# EAGLE board SX1509-Breakout_Panel_v20 (EAGLE 7.4.0), part 1 of 6
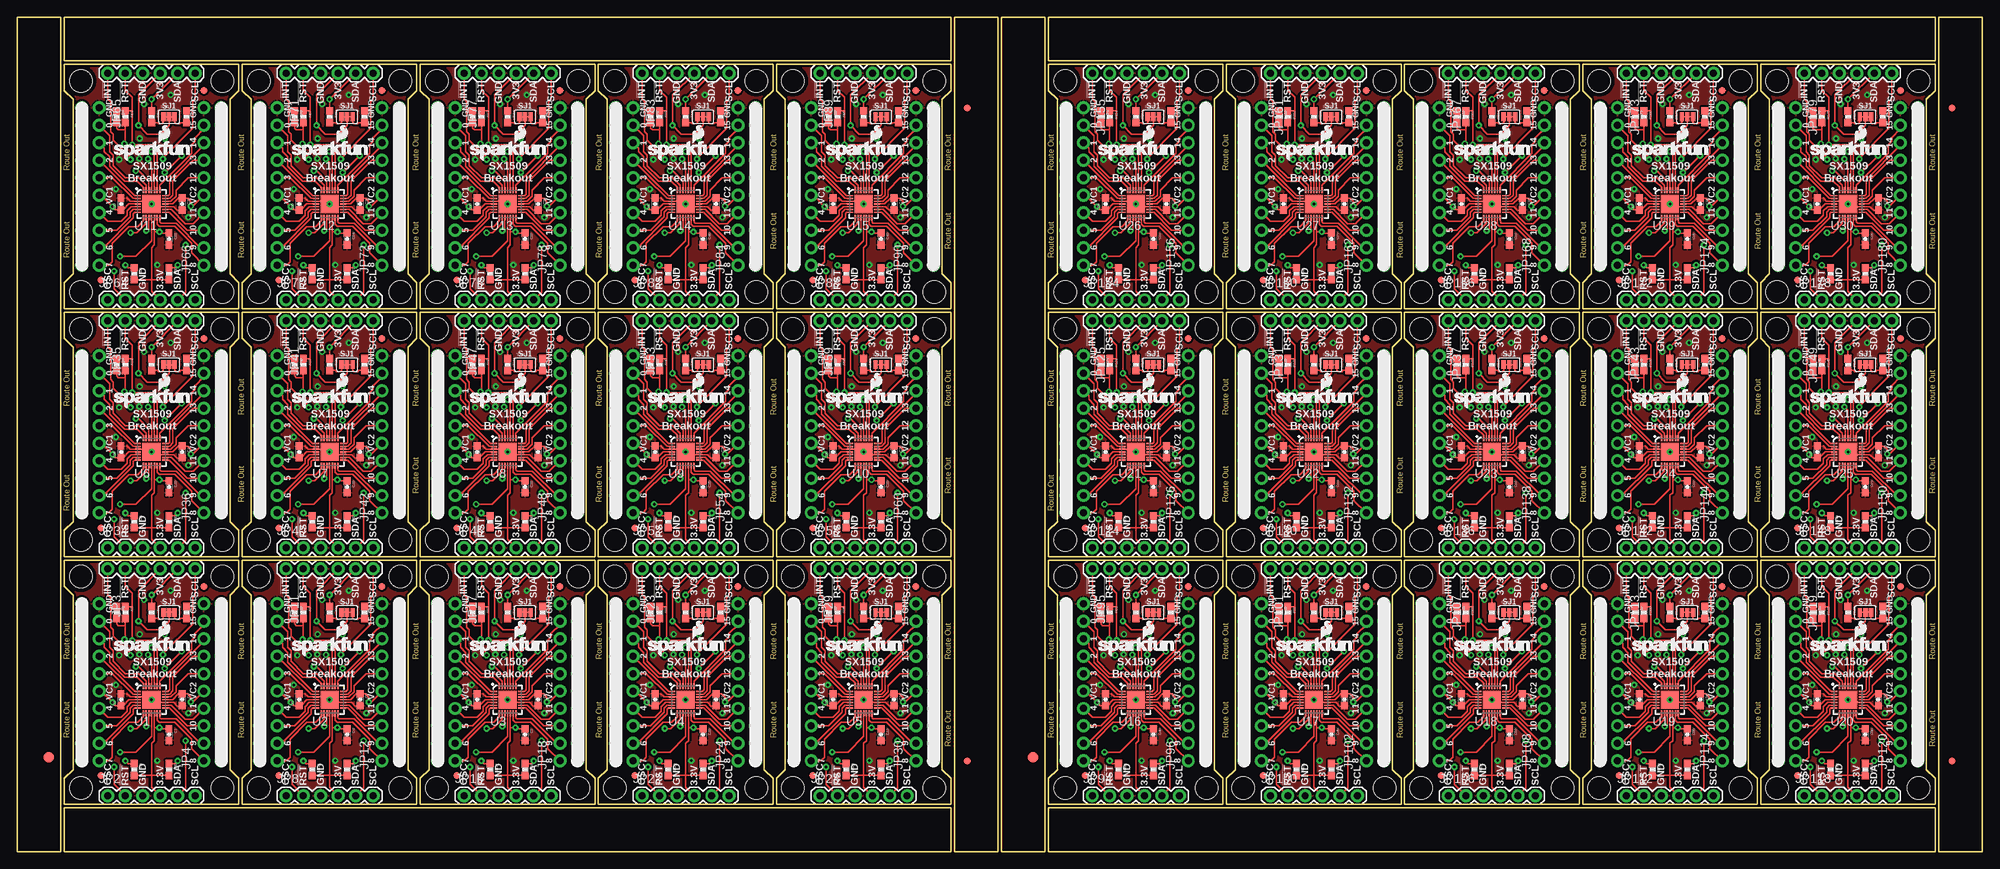
[diagram p0: board, top side]
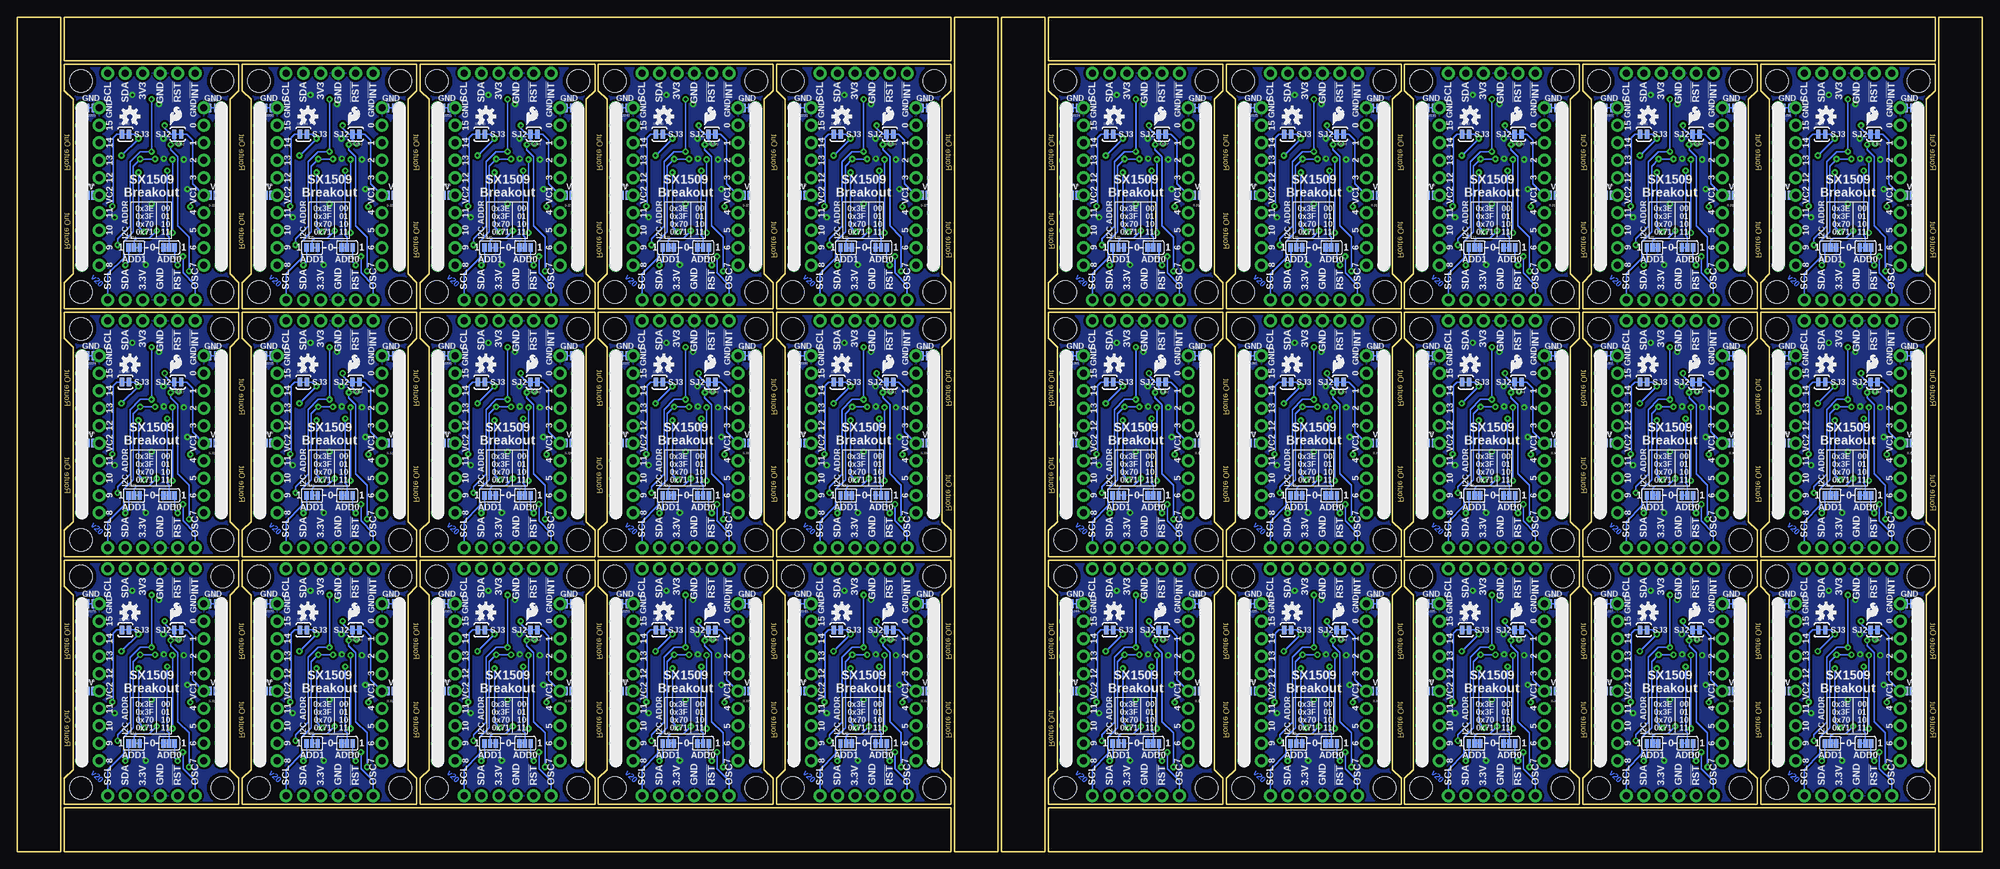
[diagram p1: board, bottom side, seen from below]

Size 286 x 121.41 mm. Coordinates in mm from the lower left corner, seen from the top.
Outline: 392 segments
Copper layers (1*16): Top 0.035mm / dielectric 1.5mm / Bottom 0.035mm
Design rules "SparkFun-2-layer *": minimum track width 7mil, minimum drill 15mil, track to track 6mil, track to pad 6mil, pad to pad 6mil, via to via 6mil, smd to smd 6mil, copper to edge 8mil, drill to drill 8mil, minimum pad ring 12mil, minimum via ring 10mil, stop-mask expansion 4mil, vias tented up to drill 20mil, thermal gap 10mil

## Footprints (pad centres in the part's own frame; a part is rotated, then mirrored left to right if it is on the bottom)
0603-CAP = smd 1.1 x 1: 1 -0.85,0; 2 0.85,0
FIDUCIAL-1.5X3 = smd 1.5 x 1.5: 1 0,0
FIDUCIAL-1X2 = smd 1 x 1: 1 0,0
1X06 = drill 1.016 pad 1.88: 1 0,0; 2 2.54,0; 3 5.08,0; 4 7.62,0; 5 10.16,0; 6 12.7,0
2X10_ROUND_NOSILK = drill 1.016 pad 1.88: 1 -11.43,-1.27; 2 -11.43,1.27; 3 -8.89,-1.27; 4 -8.89,1.27; 5 -6.35,-1.27; 6 -6.35,1.27; 7 -3.81,-1.27; 8 -3.81,1.27; 9 -1.27,-1.27; 10 -1.27,1.27; 11 1.27,-1.27; 12 1.27,1.27; 13 3.81,-1.27; 14 3.81,1.27; 15 6.35,-1.27; 16 6.35,1.27; 17 8.89,-1.27; 18 8.89,1.27; 19 11.43,-1.27; 20 11.43,1.27
0603-RES = smd 1.1 x 1: 1 -0.85,0; 2 0.85,0
PAD-JUMPER-3-3OF3_NC_BY_TRACE_YES_SILK_FULL_BOX = smd 0.635 x 1.27: 1 -0.813,0; 2 0,0; 3 0.813,0
PAD-JUMPER-2-NC_BY_TRACE_YES_SILK = smd 0.635 x 1.27: 1 -0.508,0; 2 0.508,0
PAD-JUMPER-3-2OF3_NC_BY_TRACE_YES_SILK_FULL_BOX = smd 0.635 x 1.27: 1 -0.813,0; 2 0,0; 3 0.813,0
PAD-JUMPER-2-NO_NO_SILK = smd 0.635 x 1.27: 1 -0.45,0; 2 0.45,0
PAD-JUMPER-2-NC_BY_TRACE_NO_SILK = smd 0.635 x 1.27: 1 -0.508,0; 2 0.508,0
STAND-OFF = hole 3.302: 0,0
QFN-28 = smd 0.85 x 0.2: 1 -1.975,1.2; 2 -1.975,0.8; 3 -1.975,0.4; 4 -1.975,0; 5 -1.975,-0.4; 6 -1.975,-0.8; 7 -1.975,-1.2; 15 1.975,-1.2; 16 1.975,-0.8; 17 1.975,-0.4; 18 1.975,0; 19 1.975,0.4; 20 1.975,0.8; 21 1.975,1.2 | smd 0.2 x 0.85: 8 -1.2,-1.975; 9 -0.8,-1.975; 10 -0.4,-1.975; 11 0,-1.975; 12 0.4,-1.975; 13 0.8,-1.975; 14 1.2,-1.975; 22 1.2,1.975; 23 0.8,1.975; 24 0.4,1.975; 25 0,1.975; 26 -0.4,1.975; 27 -0.8,1.975; 28 -1.2,1.975 | smd 2.65 x 2.65: 29 0,0

## Placement (x,y rotation side)
C1  0.1uF  [0603-CAP]  22.1,17.02 270 top
C2  0.1uF  [0603-CAP]  15.11,22.1 90 top
C3  0.1uF  [0603-CAP]  24,22.1 270 top
C4  0.1uF  [0603-CAP]  48.01,17.02 270 top
C5  0.1uF  [0603-CAP]  49.91,22.1 270 top
C6  0.1uF  [0603-CAP]  41.02,22.1 90 top
C7  0.1uF  [0603-CAP]  73.91,17.02 270 top
C8  0.1uF  [0603-CAP]  75.82,22.1 270 top
C9  0.1uF  [0603-CAP]  66.93,22.1 90 top
C10  0.1uF  [0603-CAP]  99.82,17.02 270 top
C11  0.1uF  [0603-CAP]  101.73,22.1 270 top
C12  0.1uF  [0603-CAP]  92.84,22.1 90 top
C13  0.1uF  [0603-CAP]  125.73,17.02 270 top
C14  0.1uF  [0603-CAP]  127.64,22.1 270 top
C15  0.1uF  [0603-CAP]  118.75,22.1 90 top
C16  0.1uF  [0603-CAP]  22.1,53.09 270 top
C17  0.1uF  [0603-CAP]  24,58.17 270 top
C18  0.1uF  [0603-CAP]  15.11,58.17 90 top
C19  0.1uF  [0603-CAP]  48.01,53.09 270 top
C20  0.1uF  [0603-CAP]  49.91,58.17 270 top
C21  0.1uF  [0603-CAP]  41.02,58.17 90 top
C22  0.1uF  [0603-CAP]  73.91,53.09 270 top
C23  0.1uF  [0603-CAP]  75.82,58.17 270 top
C24  0.1uF  [0603-CAP]  66.93,58.17 90 top
C25  0.1uF  [0603-CAP]  99.82,53.09 270 top
C26  0.1uF  [0603-CAP]  101.73,58.17 270 top
C27  0.1uF  [0603-CAP]  92.84,58.17 90 top
C28  0.1uF  [0603-CAP]  125.73,53.09 270 top
C29  0.1uF  [0603-CAP]  127.64,58.17 270 top
C30  0.1uF  [0603-CAP]  118.75,58.17 90 top
C31  0.1uF  [0603-CAP]  22.1,89.15 270 top
C32  0.1uF  [0603-CAP]  24,94.23 270 top
C33  0.1uF  [0603-CAP]  15.11,94.23 90 top
C34  0.1uF  [0603-CAP]  48.01,89.15 270 top
C35  0.1uF  [0603-CAP]  49.91,94.23 270 top
C36  0.1uF  [0603-CAP]  41.02,94.23 90 top
C37  0.1uF  [0603-CAP]  73.91,89.15 270 top
C38  0.1uF  [0603-CAP]  75.82,94.23 270 top
C39  0.1uF  [0603-CAP]  66.93,94.23 90 top
C40  0.1uF  [0603-CAP]  99.82,89.15 270 top
C41  0.1uF  [0603-CAP]  101.73,94.23 270 top
C42  0.1uF  [0603-CAP]  92.84,94.23 90 top
C43  0.1uF  [0603-CAP]  125.73,89.15 270 top
C44  0.1uF  [0603-CAP]  127.64,94.23 270 top
C45  0.1uF  [0603-CAP]  118.75,94.23 90 top
C46  0.1uF  [0603-CAP]  165.35,17.02 270 top
C47  0.1uF  [0603-CAP]  167.26,22.1 270 top
C48  0.1uF  [0603-CAP]  158.37,22.1 90 top
C49  0.1uF  [0603-CAP]  191.26,17.02 270 top
C50  0.1uF  [0603-CAP]  193.17,22.1 270 top
C51  0.1uF  [0603-CAP]  184.28,22.1 90 top
C52  0.1uF  [0603-CAP]  217.17,17.02 270 top
C53  0.1uF  [0603-CAP]  219.07,22.1 270 top
C54  0.1uF  [0603-CAP]  210.19,22.1 90 top
C55  0.1uF  [0603-CAP]  243.08,17.02 270 top
C56  0.1uF  [0603-CAP]  244.98,22.1 270 top
C57  0.1uF  [0603-CAP]  236.09,22.1 90 top
C58  0.1uF  [0603-CAP]  268.99,17.02 270 top
C59  0.1uF  [0603-CAP]  270.89,22.1 270 top
C60  0.1uF  [0603-CAP]  262,22.1 90 top
C61  0.1uF  [0603-CAP]  165.35,53.09 270 top
C62  0.1uF  [0603-CAP]  167.26,58.17 270 top
C63  0.1uF  [0603-CAP]  158.37,58.17 90 top
C64  0.1uF  [0603-CAP]  191.26,53.09 270 top
C65  0.1uF  [0603-CAP]  193.17,58.17 270 top
C66  0.1uF  [0603-CAP]  184.28,58.17 90 top
C67  0.1uF  [0603-CAP]  217.17,53.09 270 top
C68  0.1uF  [0603-CAP]  219.07,58.17 270 top
C69  0.1uF  [0603-CAP]  210.19,58.17 90 top
C70  0.1uF  [0603-CAP]  243.08,53.09 270 top
C71  0.1uF  [0603-CAP]  244.98,58.17 270 top
C72  0.1uF  [0603-CAP]  236.09,58.17 90 top
C73  0.1uF  [0603-CAP]  268.99,53.09 270 top
C74  0.1uF  [0603-CAP]  270.89,58.17 270 top
C75  0.1uF  [0603-CAP]  262,58.17 90 top
C76  0.1uF  [0603-CAP]  165.35,89.15 270 top
C77  0.1uF  [0603-CAP]  167.26,94.23 270 top
C78  0.1uF  [0603-CAP]  158.37,94.23 90 top
C79  0.1uF  [0603-CAP]  191.26,89.15 270 top
C80  0.1uF  [0603-CAP]  193.17,94.23 270 top
C81  0.1uF  [0603-CAP]  184.28,94.23 90 top
C82  0.1uF  [0603-CAP]  217.17,89.15 270 top
C83  0.1uF  [0603-CAP]  219.07,94.23 270 top
C84  0.1uF  [0603-CAP]  210.19,94.23 90 top
C85  0.1uF  [0603-CAP]  243.08,89.15 270 top
C86  0.1uF  [0603-CAP]  244.98,94.23 270 top
C87  0.1uF  [0603-CAP]  236.09,94.23 90 top
C88  0.1uF  [0603-CAP]  268.99,89.15 270 top
C89  0.1uF  [0603-CAP]  270.89,94.23 270 top
C90  0.1uF  [0603-CAP]  262,94.23 90 top
E$1  [FIDUCIAL-1.5X3]  4.57,13.72 0 top
E$2  [FIDUCIAL-1X2]  281.56,13.21 0 top
E$3  [FIDUCIAL-1X2]  281.56,108.2 180 top
E$4  [FIDUCIAL-1X2]  138.3,13.21 0 top
E$5  [FIDUCIAL-1X2]  138.3,108.2 180 top
E$6  [FIDUCIAL-1.5X3]  147.83,13.72 0 top
JP1  [1X06]  13.21,41.15 0 top
JP2  [1X06]  13.21,8.13 0 top
JP3  [2X10_ROUND_NOSILK]  10.67,24.64 270 top
JP4  [2X10_ROUND_NOSILK]  28.45,24.64 90 top
JP5  FIDUCIAL1X2  [FIDUCIAL-1X2]  53.09,38.61 0 top
JP6  FIDUCIAL1X2  [FIDUCIAL-1X2]  38.1,11.05 0 top
JP7  [1X06]  39.12,41.15 0 top
JP8  [1X06]  39.12,8.13 0 top
JP9  FIDUCIAL1X2  [FIDUCIAL-1X2]  27.18,38.61 0 top
JP10  FIDUCIAL1X2  [FIDUCIAL-1X2]  12.19,11.05 0 top
JP11  [2X10_ROUND_NOSILK]  36.58,24.64 270 top
JP12  [2X10_ROUND_NOSILK]  54.36,24.64 90 top
JP13  FIDUCIAL1X2  [FIDUCIAL-1X2]  78.99,38.61 0 top
JP14  FIDUCIAL1X2  [FIDUCIAL-1X2]  64.01,11.05 0 top
JP15  [1X06]  65.02,41.15 0 top
JP16  [1X06]  65.02,8.13 0 top
JP17  [2X10_ROUND_NOSILK]  62.48,24.64 270 top
JP18  [2X10_ROUND_NOSILK]  80.26,24.64 90 top
JP19  FIDUCIAL1X2  [FIDUCIAL-1X2]  104.9,38.61 0 top
JP20  FIDUCIAL1X2  [FIDUCIAL-1X2]  89.92,11.05 0 top
JP21  [1X06]  90.93,41.15 0 top
JP22  [1X06]  90.93,8.13 0 top
JP23  [2X10_ROUND_NOSILK]  88.39,24.64 270 top
JP24  [2X10_ROUND_NOSILK]  106.17,24.64 90 top
JP25  FIDUCIAL1X2  [FIDUCIAL-1X2]  130.81,38.61 0 top
JP26  FIDUCIAL1X2  [FIDUCIAL-1X2]  115.82,11.05 0 top
JP27  [1X06]  116.84,41.15 0 top
JP28  [1X06]  116.84,8.13 0 top
JP29  [2X10_ROUND_NOSILK]  114.3,24.64 270 top
JP30  [2X10_ROUND_NOSILK]  132.08,24.64 90 top
JP31  FIDUCIAL1X2  [FIDUCIAL-1X2]  27.18,74.68 0 top
JP32  FIDUCIAL1X2  [FIDUCIAL-1X2]  12.19,47.12 0 top
JP33  [1X06]  13.21,77.22 0 top
JP34  [1X06]  13.21,44.2 0 top
JP35  [2X10_ROUND_NOSILK]  10.67,60.71 270 top
JP36  [2X10_ROUND_NOSILK]  28.45,60.71 90 top
JP37  FIDUCIAL1X2  [FIDUCIAL-1X2]  53.09,74.68 0 top
JP38  FIDUCIAL1X2  [FIDUCIAL-1X2]  38.1,47.12 0 top
JP39  [1X06]  39.12,77.22 0 top
JP40  [1X06]  39.12,44.2 0 top
JP41  [2X10_ROUND_NOSILK]  36.58,60.71 270 top
JP42  [2X10_ROUND_NOSILK]  54.36,60.71 90 top
JP43  FIDUCIAL1X2  [FIDUCIAL-1X2]  78.99,74.68 0 top
JP44  FIDUCIAL1X2  [FIDUCIAL-1X2]  64.01,47.12 0 top
JP45  [1X06]  65.02,77.22 0 top
JP46  [1X06]  65.02,44.2 0 top
JP47  [2X10_ROUND_NOSILK]  62.48,60.71 270 top
JP48  [2X10_ROUND_NOSILK]  80.26,60.71 90 top
JP49  FIDUCIAL1X2  [FIDUCIAL-1X2]  104.9,74.68 0 top
JP50  FIDUCIAL1X2  [FIDUCIAL-1X2]  89.92,47.12 0 top
JP51  [1X06]  90.93,77.22 0 top
JP52  [1X06]  90.93,44.2 0 top
JP53  [2X10_ROUND_NOSILK]  88.39,60.71 270 top
JP54  [2X10_ROUND_NOSILK]  106.17,60.71 90 top
JP55  FIDUCIAL1X2  [FIDUCIAL-1X2]  130.81,74.68 0 top
JP56  FIDUCIAL1X2  [FIDUCIAL-1X2]  115.82,47.12 0 top
JP57  [1X06]  116.84,77.22 0 top
JP58  [1X06]  116.84,44.2 0 top
JP59  [2X10_ROUND_NOSILK]  114.3,60.71 270 top
JP60  [2X10_ROUND_NOSILK]  132.08,60.71 90 top
JP61  FIDUCIAL1X2  [FIDUCIAL-1X2]  27.18,110.74 0 top
JP62  FIDUCIAL1X2  [FIDUCIAL-1X2]  12.19,83.19 0 top
JP63  [1X06]  13.21,113.28 0 top
JP64  [1X06]  13.21,80.26 0 top
JP65  [2X10_ROUND_NOSILK]  10.67,96.77 270 top
JP66  [2X10_ROUND_NOSILK]  28.45,96.77 90 top
JP67  FIDUCIAL1X2  [FIDUCIAL-1X2]  53.09,110.74 0 top
JP68  FIDUCIAL1X2  [FIDUCIAL-1X2]  38.1,83.19 0 top
JP69  [1X06]  39.12,113.28 0 top
JP70  [1X06]  39.12,80.26 0 top
JP71  [2X10_ROUND_NOSILK]  36.58,96.77 270 top
JP72  [2X10_ROUND_NOSILK]  54.36,96.77 90 top
JP73  FIDUCIAL1X2  [FIDUCIAL-1X2]  78.99,110.74 0 top
JP74  FIDUCIAL1X2  [FIDUCIAL-1X2]  64.01,83.19 0 top
JP75  [1X06]  65.02,113.28 0 top
JP76  [1X06]  65.02,80.26 0 top
JP77  [2X10_ROUND_NOSILK]  62.48,96.77 270 top
JP78  [2X10_ROUND_NOSILK]  80.26,96.77 90 top
JP79  FIDUCIAL1X2  [FIDUCIAL-1X2]  104.9,110.74 0 top
JP80  FIDUCIAL1X2  [FIDUCIAL-1X2]  89.92,83.19 0 top
JP81  [1X06]  90.93,113.28 0 top
JP82  [1X06]  90.93,80.26 0 top
JP83  [2X10_ROUND_NOSILK]  88.39,96.77 270 top
JP84  [2X10_ROUND_NOSILK]  106.17,96.77 90 top
JP85  FIDUCIAL1X2  [FIDUCIAL-1X2]  130.81,110.74 0 top
JP86  FIDUCIAL1X2  [FIDUCIAL-1X2]  115.82,83.19 0 top
JP87  [1X06]  116.84,113.28 0 top
JP88  [1X06]  116.84,80.26 0 top
JP89  [2X10_ROUND_NOSILK]  114.3,96.77 270 top
JP90  [2X10_ROUND_NOSILK]  132.08,96.77 90 top
JP91  FIDUCIAL1X2  [FIDUCIAL-1X2]  170.43,38.61 0 top
JP92  FIDUCIAL1X2  [FIDUCIAL-1X2]  155.45,11.05 0 top
JP93  [1X06]  156.46,41.15 0 top
JP94  [1X06]  156.46,8.13 0 top
JP95  [2X10_ROUND_NOSILK]  153.92,24.64 270 top
JP96  [2X10_ROUND_NOSILK]  171.7,24.64 90 top
JP97  FIDUCIAL1X2  [FIDUCIAL-1X2]  196.34,38.61 0 top
JP98  FIDUCIAL1X2  [FIDUCIAL-1X2]  181.36,11.05 0 top
JP99  [1X06]  182.37,41.15 0 top
JP100  [1X06]  182.37,8.13 0 top
JP101  [2X10_ROUND_NOSILK]  179.83,24.64 270 top
JP102  [2X10_ROUND_NOSILK]  197.61,24.64 90 top
JP103  FIDUCIAL1X2  [FIDUCIAL-1X2]  222.25,38.61 0 top
JP104  FIDUCIAL1X2  [FIDUCIAL-1X2]  207.26,11.05 0 top
JP105  [1X06]  208.28,41.15 0 top
JP106  [1X06]  208.28,8.13 0 top
JP107  [2X10_ROUND_NOSILK]  205.74,24.64 270 top
JP108  [2X10_ROUND_NOSILK]  223.52,24.64 90 top
JP109  FIDUCIAL1X2  [FIDUCIAL-1X2]  248.16,38.61 0 top
JP110  FIDUCIAL1X2  [FIDUCIAL-1X2]  233.17,11.05 0 top
JP111  [1X06]  234.19,41.15 0 top
JP112  [1X06]  234.19,8.13 0 top
JP113  [2X10_ROUND_NOSILK]  231.65,24.64 270 top
JP114  [2X10_ROUND_NOSILK]  249.43,24.64 90 top
JP115  FIDUCIAL1X2  [FIDUCIAL-1X2]  274.07,38.61 0 top
JP116  FIDUCIAL1X2  [FIDUCIAL-1X2]  259.08,11.05 0 top
JP117  [1X06]  260.1,41.15 0 top
JP118  [1X06]  260.1,8.13 0 top
JP119  [2X10_ROUND_NOSILK]  257.56,24.64 270 top
JP120  [2X10_ROUND_NOSILK]  275.34,24.64 90 top
JP121  FIDUCIAL1X2  [FIDUCIAL-1X2]  170.43,74.68 0 top
JP122  FIDUCIAL1X2  [FIDUCIAL-1X2]  155.45,47.12 0 top
JP123  [1X06]  156.46,77.22 0 top
JP124  [1X06]  156.46,44.2 0 top
JP125  [2X10_ROUND_NOSILK]  153.92,60.71 270 top
JP126  [2X10_ROUND_NOSILK]  171.7,60.71 90 top
JP127  FIDUCIAL1X2  [FIDUCIAL-1X2]  196.34,74.68 0 top
JP128  FIDUCIAL1X2  [FIDUCIAL-1X2]  181.36,47.12 0 top
JP129  [1X06]  182.37,77.22 0 top
JP130  [1X06]  182.37,44.2 0 top
JP131  [2X10_ROUND_NOSILK]  179.83,60.71 270 top
JP132  [2X10_ROUND_NOSILK]  197.61,60.71 90 top
JP133  FIDUCIAL1X2  [FIDUCIAL-1X2]  222.25,74.68 0 top
JP134  FIDUCIAL1X2  [FIDUCIAL-1X2]  207.26,47.12 0 top
JP135  [1X06]  208.28,77.22 0 top
JP136  [1X06]  208.28,44.2 0 top
JP137  [2X10_ROUND_NOSILK]  205.74,60.71 270 top
JP138  [2X10_ROUND_NOSILK]  223.52,60.71 90 top
JP139  FIDUCIAL1X2  [FIDUCIAL-1X2]  248.16,74.68 0 top
JP140  FIDUCIAL1X2  [FIDUCIAL-1X2]  233.17,47.12 0 top
JP141  [1X06]  234.19,77.22 0 top
JP142  [1X06]  234.19,44.2 0 top
JP143  [2X10_ROUND_NOSILK]  231.65,60.71 270 top
JP144  [2X10_ROUND_NOSILK]  249.43,60.71 90 top
JP145  FIDUCIAL1X2  [FIDUCIAL-1X2]  274.07,74.68 0 top
JP146  FIDUCIAL1X2  [FIDUCIAL-1X2]  259.08,47.12 0 top
JP147  [1X06]  260.1,77.22 0 top
JP148  [1X06]  260.1,44.2 0 top
JP149  [2X10_ROUND_NOSILK]  257.56,60.71 270 top
JP150  [2X10_ROUND_NOSILK]  275.34,60.71 90 top
JP151  FIDUCIAL1X2  [FIDUCIAL-1X2]  170.43,110.74 0 top
JP152  FIDUCIAL1X2  [FIDUCIAL-1X2]  155.45,83.19 0 top
JP153  [1X06]  156.46,113.28 0 top
JP154  [1X06]  156.46,80.26 0 top
JP155  [2X10_ROUND_NOSILK]  153.92,96.77 270 top
JP156  [2X10_ROUND_NOSILK]  171.7,96.77 90 top
JP157  FIDUCIAL1X2  [FIDUCIAL-1X2]  196.34,110.74 0 top
JP158  FIDUCIAL1X2  [FIDUCIAL-1X2]  181.36,83.19 0 top
JP159  [1X06]  182.37,113.28 0 top
JP160  [1X06]  182.37,80.26 0 top
JP161  [2X10_ROUND_NOSILK]  179.83,96.77 270 top
JP162  [2X10_ROUND_NOSILK]  197.61,96.77 90 top
JP163  FIDUCIAL1X2  [FIDUCIAL-1X2]  222.25,110.74 0 top
JP164  FIDUCIAL1X2  [FIDUCIAL-1X2]  207.26,83.19 0 top
JP165  [1X06]  208.28,113.28 0 top
JP166  [1X06]  208.28,80.26 0 top
JP167  [2X10_ROUND_NOSILK]  205.74,96.77 270 top
JP168  [2X10_ROUND_NOSILK]  223.52,96.77 90 top
JP169  FIDUCIAL1X2  [FIDUCIAL-1X2]  248.16,110.74 0 top
JP170  FIDUCIAL1X2  [FIDUCIAL-1X2]  233.17,83.19 0 top
JP171  [1X06]  234.19,113.28 0 top
JP172  [1X06]  234.19,80.26 0 top
JP173  [2X10_ROUND_NOSILK]  231.65,96.77 270 top
JP174  [2X10_ROUND_NOSILK]  249.43,96.77 90 top
JP175  FIDUCIAL1X2  [FIDUCIAL-1X2]  274.07,110.74 0 top
JP176  FIDUCIAL1X2  [FIDUCIAL-1X2]  259.08,83.19 0 top
JP177  [1X06]  260.1,113.28 0 top
JP178  [1X06]  260.1,80.26 0 top
JP179  [2X10_ROUND_NOSILK]  257.56,96.77 270 top
JP180  [2X10_ROUND_NOSILK]  275.34,96.77 90 top
LOGO1  SFE_LOGO_NAME_FLAME.1_INCH  [SFE_LOGO_NAME_FLAME_.1]  13.72,28.32 0 top
LOGO2  SFE_LOGO_FLAME.1_INCH  [SFE_LOGO_FLAME_.1]  17.14,33.27 0 bottom
LOGO3  OSHW-LOGOS  [OSHW-LOGO-S]  22.73,34.8 0 bottom
LOGO4  OSHW-LOGOS  [OSHW-LOGO-S]  48.64,34.8 0 bottom
LOGO5  SFE_LOGO_FLAME.1_INCH  [SFE_LOGO_FLAME_.1]  43.05,33.27 0 bottom
LOGO6  SFE_LOGO_NAME_FLAME.1_INCH  [SFE_LOGO_NAME_FLAME_.1]  39.62,28.32 0 top
LOGO7  OSHW-LOGOS  [OSHW-LOGO-S]  74.55,34.8 0 bottom
LOGO8  SFE_LOGO_FLAME.1_INCH  [SFE_LOGO_FLAME_.1]  68.96,33.27 0 bottom
LOGO9  SFE_LOGO_NAME_FLAME.1_INCH  [SFE_LOGO_NAME_FLAME_.1]  65.53,28.32 0 top
LOGO10  OSHW-LOGOS  [OSHW-LOGO-S]  100.46,34.8 0 bottom
LOGO11  SFE_LOGO_FLAME.1_INCH  [SFE_LOGO_FLAME_.1]  94.87,33.27 0 bottom
LOGO12  SFE_LOGO_NAME_FLAME.1_INCH  [SFE_LOGO_NAME_FLAME_.1]  91.44,28.32 0 top
LOGO13  OSHW-LOGOS  [OSHW-LOGO-S]  126.36,34.8 0 bottom
LOGO14  SFE_LOGO_FLAME.1_INCH  [SFE_LOGO_FLAME_.1]  120.78,33.27 0 bottom
LOGO15  SFE_LOGO_NAME_FLAME.1_INCH  [SFE_LOGO_NAME_FLAME_.1]  117.35,28.32 0 top
LOGO16  OSHW-LOGOS  [OSHW-LOGO-S]  22.73,70.87 0 bottom
LOGO17  SFE_LOGO_FLAME.1_INCH  [SFE_LOGO_FLAME_.1]  17.14,69.34 0 bottom
LOGO18  SFE_LOGO_NAME_FLAME.1_INCH  [SFE_LOGO_NAME_FLAME_.1]  13.72,64.39 0 top
LOGO19  OSHW-LOGOS  [OSHW-LOGO-S]  48.64,70.87 0 bottom
LOGO20  SFE_LOGO_FLAME.1_INCH  [SFE_LOGO_FLAME_.1]  43.05,69.34 0 bottom
LOGO21  SFE_LOGO_NAME_FLAME.1_INCH  [SFE_LOGO_NAME_FLAME_.1]  39.62,64.39 0 top
LOGO22  OSHW-LOGOS  [OSHW-LOGO-S]  74.55,70.87 0 bottom
LOGO23  SFE_LOGO_FLAME.1_INCH  [SFE_LOGO_FLAME_.1]  68.96,69.34 0 bottom
LOGO24  SFE_LOGO_NAME_FLAME.1_INCH  [SFE_LOGO_NAME_FLAME_.1]  65.53,64.39 0 top
LOGO25  OSHW-LOGOS  [OSHW-LOGO-S]  100.46,70.87 0 bottom
LOGO26  SFE_LOGO_FLAME.1_INCH  [SFE_LOGO_FLAME_.1]  94.87,69.34 0 bottom
LOGO27  SFE_LOGO_NAME_FLAME.1_INCH  [SFE_LOGO_NAME_FLAME_.1]  91.44,64.39 0 top
LOGO28  OSHW-LOGOS  [OSHW-LOGO-S]  126.36,70.87 0 bottom
LOGO29  SFE_LOGO_FLAME.1_INCH  [SFE_LOGO_FLAME_.1]  120.78,69.34 0 bottom
LOGO30  SFE_LOGO_NAME_FLAME.1_INCH  [SFE_LOGO_NAME_FLAME_.1]  117.35,64.39 0 top
LOGO31  OSHW-LOGOS  [OSHW-LOGO-S]  22.73,106.93 0 bottom
LOGO32  SFE_LOGO_FLAME.1_INCH  [SFE_LOGO_FLAME_.1]  17.14,105.41 0 bottom
LOGO33  SFE_LOGO_NAME_FLAME.1_INCH  [SFE_LOGO_NAME_FLAME_.1]  13.72,100.46 0 top
LOGO34  OSHW-LOGOS  [OSHW-LOGO-S]  48.64,106.93 0 bottom
LOGO35  SFE_LOGO_FLAME.1_INCH  [SFE_LOGO_FLAME_.1]  43.05,105.41 0 bottom
LOGO36  SFE_LOGO_NAME_FLAME.1_INCH  [SFE_LOGO_NAME_FLAME_.1]  39.62,100.46 0 top
LOGO37  OSHW-LOGOS  [OSHW-LOGO-S]  74.55,106.93 0 bottom
LOGO38  SFE_LOGO_FLAME.1_INCH  [SFE_LOGO_FLAME_.1]  68.96,105.41 0 bottom
LOGO39  SFE_LOGO_NAME_FLAME.1_INCH  [SFE_LOGO_NAME_FLAME_.1]  65.53,100.46 0 top
LOGO40  OSHW-LOGOS  [OSHW-LOGO-S]  100.46,106.93 0 bottom
LOGO41  SFE_LOGO_FLAME.1_INCH  [SFE_LOGO_FLAME_.1]  94.87,105.41 0 bottom
LOGO42  SFE_LOGO_NAME_FLAME.1_INCH  [SFE_LOGO_NAME_FLAME_.1]  91.44,100.46 0 top
LOGO43  OSHW-LOGOS  [OSHW-LOGO-S]  126.36,106.93 0 bottom
LOGO44  SFE_LOGO_FLAME.1_INCH  [SFE_LOGO_FLAME_.1]  120.78,105.41 0 bottom
LOGO45  SFE_LOGO_NAME_FLAME.1_INCH  [SFE_LOGO_NAME_FLAME_.1]  117.35,100.46 0 top
LOGO46  OSHW-LOGOS  [OSHW-LOGO-S]  165.99,34.8 0 bottom
LOGO47  SFE_LOGO_FLAME.1_INCH  [SFE_LOGO_FLAME_.1]  160.4,33.27 0 bottom
LOGO48  SFE_LOGO_NAME_FLAME.1_INCH  [SFE_LOGO_NAME_FLAME_.1]  156.97,28.32 0 top
LOGO49  OSHW-LOGOS  [OSHW-LOGO-S]  191.9,34.8 0 bottom
LOGO50  SFE_LOGO_FLAME.1_INCH  [SFE_LOGO_FLAME_.1]  186.31,33.27 0 bottom
LOGO51  SFE_LOGO_NAME_FLAME.1_INCH  [SFE_LOGO_NAME_FLAME_.1]  182.88,28.32 0 top
LOGO52  OSHW-LOGOS  [OSHW-LOGO-S]  217.81,34.8 0 bottom
LOGO53  SFE_LOGO_FLAME.1_INCH  [SFE_LOGO_FLAME_.1]  212.22,33.27 0 bottom
LOGO54  SFE_LOGO_NAME_FLAME.1_INCH  [SFE_LOGO_NAME_FLAME_.1]  208.79,28.32 0 top
LOGO55  OSHW-LOGOS  [OSHW-LOGO-S]  243.71,34.8 0 bottom
LOGO56  SFE_LOGO_FLAME.1_INCH  [SFE_LOGO_FLAME_.1]  238.12,33.27 0 bottom
LOGO57  SFE_LOGO_NAME_FLAME.1_INCH  [SFE_LOGO_NAME_FLAME_.1]  234.7,28.32 0 top
LOGO58  OSHW-LOGOS  [OSHW-LOGO-S]  269.62,34.8 0 bottom
LOGO59  SFE_LOGO_FLAME.1_INCH  [SFE_LOGO_FLAME_.1]  264.03,33.27 0 bottom
LOGO60  SFE_LOGO_NAME_FLAME.1_INCH  [SFE_LOGO_NAME_FLAME_.1]  260.6,28.32 0 top
LOGO61  OSHW-LOGOS  [OSHW-LOGO-S]  165.99,70.87 0 bottom
LOGO62  SFE_LOGO_FLAME.1_INCH  [SFE_LOGO_FLAME_.1]  160.4,69.34 0 bottom
LOGO63  SFE_LOGO_NAME_FLAME.1_INCH  [SFE_LOGO_NAME_FLAME_.1]  156.97,64.39 0 top
LOGO64  OSHW-LOGOS  [OSHW-LOGO-S]  191.9,70.87 0 bottom
LOGO65  SFE_LOGO_FLAME.1_INCH  [SFE_LOGO_FLAME_.1]  186.31,69.34 0 bottom
LOGO66  SFE_LOGO_NAME_FLAME.1_INCH  [SFE_LOGO_NAME_FLAME_.1]  182.88,64.39 0 top
LOGO67  OSHW-LOGOS  [OSHW-LOGO-S]  217.81,70.87 0 bottom
LOGO68  SFE_LOGO_FLAME.1_INCH  [SFE_LOGO_FLAME_.1]  212.22,69.34 0 bottom
LOGO69  SFE_LOGO_NAME_FLAME.1_INCH  [SFE_LOGO_NAME_FLAME_.1]  208.79,64.39 0 top
LOGO70  OSHW-LOGOS  [OSHW-LOGO-S]  243.71,70.87 0 bottom
LOGO71  SFE_LOGO_FLAME.1_INCH  [SFE_LOGO_FLAME_.1]  238.12,69.34 0 bottom
LOGO72  SFE_LOGO_NAME_FLAME.1_INCH  [SFE_LOGO_NAME_FLAME_.1]  234.7,64.39 0 top
LOGO73  OSHW-LOGOS  [OSHW-LOGO-S]  269.62,70.87 0 bottom
LOGO74  SFE_LOGO_FLAME.1_INCH  [SFE_LOGO_FLAME_.1]  264.03,69.34 0 bottom
LOGO75  SFE_LOGO_NAME_FLAME.1_INCH  [SFE_LOGO_NAME_FLAME_.1]  260.6,64.39 0 top
LOGO76  OSHW-LOGOS  [OSHW-LOGO-S]  165.99,106.93 0 bottom
LOGO77  SFE_LOGO_FLAME.1_INCH  [SFE_LOGO_FLAME_.1]  160.4,105.41 0 bottom
LOGO78  SFE_LOGO_NAME_FLAME.1_INCH  [SFE_LOGO_NAME_FLAME_.1]  156.97,100.46 0 top
LOGO79  OSHW-LOGOS  [OSHW-LOGO-S]  191.9,106.93 0 bottom
LOGO80  SFE_LOGO_FLAME.1_INCH  [SFE_LOGO_FLAME_.1]  186.31,105.41 0 bottom
LOGO81  SFE_LOGO_NAME_FLAME.1_INCH  [SFE_LOGO_NAME_FLAME_.1]  182.88,100.46 0 top
LOGO82  OSHW-LOGOS  [OSHW-LOGO-S]  217.81,106.93 0 bottom
LOGO83  SFE_LOGO_FLAME.1_INCH  [SFE_LOGO_FLAME_.1]  212.22,105.41 0 bottom
LOGO84  SFE_LOGO_NAME_FLAME.1_INCH  [SFE_LOGO_NAME_FLAME_.1]  208.79,100.46 0 top
LOGO85  OSHW-LOGOS  [OSHW-LOGO-S]  243.71,106.93 0 bottom
LOGO86  SFE_LOGO_FLAME.1_INCH  [SFE_LOGO_FLAME_.1]  238.12,105.41 0 bottom
LOGO87  SFE_LOGO_NAME_FLAME.1_INCH  [SFE_LOGO_NAME_FLAME_.1]  234.7,100.46 0 top
LOGO88  OSHW-LOGOS  [OSHW-LOGO-S]  269.62,106.93 0 bottom
LOGO89  SFE_LOGO_FLAME.1_INCH  [SFE_LOGO_FLAME_.1]  264.03,105.41 0 bottom
LOGO90  SFE_LOGO_NAME_FLAME.1_INCH  [SFE_LOGO_NAME_FLAME_.1]  260.6,100.46 0 top
R1  10K  [0603-RES]  14.48,34.8 270 top
R2  10K  [0603-RES]  24.64,34.8 270 top
R3  10K  [0603-RES]  15.75,34.8 270 top
R4  10K  [0603-RES]  19.56,34.8 270 top
R5  10K  [0603-RES]  17.02,11.94 270 top
R6  10K  [0603-RES]  22.1,11.94 270 top
R7  10K  [0603-RES]  41.66,34.8 270 top
R8  10K  [0603-RES]  45.47,34.8 270 top
R9  10K  [0603-RES]  50.55,34.8 270 top
R10  10K  [0603-RES]  40.39,34.8 270 top
R11  10K  [0603-RES]  42.93,11.94 270 top
R12  10K  [0603-RES]  48.01,11.94 270 top
R13  10K  [0603-RES]  67.56,34.8 270 top
R14  10K  [0603-RES]  71.37,34.8 270 top
R15  10K  [0603-RES]  76.45,34.8 270 top
R16  10K  [0603-RES]  66.29,34.8 270 top
R17  10K  [0603-RES]  68.83,11.94 270 top
R18  10K  [0603-RES]  73.91,11.94 270 top
R19  10K  [0603-RES]  93.47,34.8 270 top
R20  10K  [0603-RES]  97.28,34.8 270 top
R21  10K  [0603-RES]  102.36,34.8 270 top
R22  10K  [0603-RES]  92.2,34.8 270 top
R23  10K  [0603-RES]  94.74,11.94 270 top
R24  10K  [0603-RES]  99.82,11.94 270 top
R25  10K  [0603-RES]  119.38,34.8 270 top
R26  10K  [0603-RES]  123.19,34.8 270 top
R27  10K  [0603-RES]  128.27,34.8 270 top
R28  10K  [0603-RES]  118.11,34.8 270 top
R29  10K  [0603-RES]  120.65,11.94 270 top
R30  10K  [0603-RES]  125.73,11.94 270 top
R31  10K  [0603-RES]  15.75,70.87 270 top
R32  10K  [0603-RES]  19.56,70.87 270 top
R33  10K  [0603-RES]  24.64,70.87 270 top
R34  10K  [0603-RES]  14.48,70.87 270 top
R35  10K  [0603-RES]  17.02,48.01 270 top
R36  10K  [0603-RES]  22.1,48.01 270 top
R37  10K  [0603-RES]  41.66,70.87 270 top
R38  10K  [0603-RES]  45.47,70.87 270 top
R39  10K  [0603-RES]  50.55,70.87 270 top
R40  10K  [0603-RES]  40.39,70.87 270 top
R41  10K  [0603-RES]  42.93,48.01 270 top
R42  10K  [0603-RES]  48.01,48.01 270 top
R43  10K  [0603-RES]  67.56,70.87 270 top
R44  10K  [0603-RES]  71.37,70.87 270 top
R45  10K  [0603-RES]  76.45,70.87 270 top
R46  10K  [0603-RES]  66.29,70.87 270 top
R47  10K  [0603-RES]  68.83,48.01 270 top
R48  10K  [0603-RES]  73.91,48.01 270 top
R49  10K  [0603-RES]  93.47,70.87 270 top
R50  10K  [0603-RES]  97.28,70.87 270 top
R51  10K  [0603-RES]  102.36,70.87 270 top
R52  10K  [0603-RES]  92.2,70.87 270 top
R53  10K  [0603-RES]  94.74,48.01 270 top
R54  10K  [0603-RES]  99.82,48.01 270 top
R55  10K  [0603-RES]  119.38,70.87 270 top
R56  10K  [0603-RES]  123.19,70.87 270 top
R57  10K  [0603-RES]  128.27,70.87 270 top
R58  10K  [0603-RES]  118.11,70.87 270 top
R59  10K  [0603-RES]  120.65,48.01 270 top
R60  10K  [0603-RES]  125.73,48.01 270 top
R61  10K  [0603-RES]  15.75,106.93 270 top
R62  10K  [0603-RES]  19.56,106.93 270 top
R63  10K  [0603-RES]  24.64,106.93 270 top
R64  10K  [0603-RES]  14.48,106.93 270 top
R65  10K  [0603-RES]  17.02,84.07 270 top
R66  10K  [0603-RES]  22.1,84.07 270 top
R67  10K  [0603-RES]  41.66,106.93 270 top
R68  10K  [0603-RES]  45.47,106.93 270 top
R69  10K  [0603-RES]  50.55,106.93 270 top
R70  10K  [0603-RES]  40.39,106.93 270 top
R71  10K  [0603-RES]  42.93,84.07 270 top
R72  10K  [0603-RES]  48.01,84.07 270 top
R73  10K  [0603-RES]  67.56,106.93 270 top
R74  10K  [0603-RES]  71.37,106.93 270 top
R75  10K  [0603-RES]  76.45,106.93 270 top
R76  10K  [0603-RES]  66.29,106.93 270 top
R77  10K  [0603-RES]  68.83,84.07 270 top
R78  10K  [0603-RES]  73.91,84.07 270 top
R79  10K  [0603-RES]  93.47,106.93 270 top
R80  10K  [0603-RES]  97.28,106.93 270 top
R81  10K  [0603-RES]  102.36,106.93 270 top
R82  10K  [0603-RES]  92.2,106.93 270 top
R83  10K  [0603-RES]  94.74,84.07 270 top
R84  10K  [0603-RES]  99.82,84.07 270 top
R85  10K  [0603-RES]  119.38,106.93 270 top
R86  10K  [0603-RES]  123.19,106.93 270 top
R87  10K  [0603-RES]  128.27,106.93 270 top
R88  10K  [0603-RES]  118.11,106.93 270 top
R89  10K  [0603-RES]  120.65,84.07 270 top
R90  10K  [0603-RES]  125.73,84.07 270 top
R91  10K  [0603-RES]  159,34.8 270 top
R92  10K  [0603-RES]  162.81,34.8 270 top
R93  10K  [0603-RES]  167.89,34.8 270 top
R94  10K  [0603-RES]  157.73,34.8 270 top
R95  10K  [0603-RES]  160.27,11.94 270 top
R96  10K  [0603-RES]  165.35,11.94 270 top
R97  10K  [0603-RES]  184.91,34.8 270 top
R98  10K  [0603-RES]  188.72,34.8 270 top
R99  10K  [0603-RES]  193.8,34.8 270 top
R100  10K  [0603-RES]  183.64,34.8 270 top
R101  10K  [0603-RES]  186.18,11.94 270 top
R102  10K  [0603-RES]  191.26,11.94 270 top
R103  10K  [0603-RES]  210.82,34.8 270 top
R104  10K  [0603-RES]  214.63,34.8 270 top
R105  10K  [0603-RES]  219.71,34.8 270 top
R106  10K  [0603-RES]  209.55,34.8 270 top
R107  10K  [0603-RES]  212.09,11.94 270 top
R108  10K  [0603-RES]  217.17,11.94 270 top
R109  10K  [0603-RES]  236.73,34.8 270 top
R110  10K  [0603-RES]  240.54,34.8 270 top
R111  10K  [0603-RES]  245.62,34.8 270 top
R112  10K  [0603-RES]  235.46,34.8 270 top
R113  10K  [0603-RES]  238,11.94 270 top
R114  10K  [0603-RES]  243.08,11.94 270 top
R115  10K  [0603-RES]  262.64,34.8 270 top
R116  10K  [0603-RES]  266.45,34.8 270 top
R117  10K  [0603-RES]  271.53,34.8 270 top
R118  10K  [0603-RES]  261.37,34.8 270 top
R119  10K  [0603-RES]  263.91,11.94 270 top
R120  10K  [0603-RES]  268.99,11.94 270 top
R121  10K  [0603-RES]  159,70.87 270 top
R122  10K  [0603-RES]  162.81,70.87 270 top
R123  10K  [0603-RES]  167.89,70.87 270 top
R124  10K  [0603-RES]  157.73,70.87 270 top
R125  10K  [0603-RES]  160.27,48.01 270 top
R126  10K  [0603-RES]  165.35,48.01 270 top
R127  10K  [0603-RES]  184.91,70.87 270 top
R128  10K  [0603-RES]  188.72,70.87 270 top
R129  10K  [0603-RES]  193.8,70.87 270 top
R130  10K  [0603-RES]  183.64,70.87 270 top
R131  10K  [0603-RES]  186.18,48.01 270 top
R132  10K  [0603-RES]  191.26,48.01 270 top
R133  10K  [0603-RES]  210.82,70.87 270 top
R134  10K  [0603-RES]  214.63,70.87 270 top
R135  10K  [0603-RES]  219.71,70.87 270 top
R136  10K  [0603-RES]  209.55,70.87 270 top
R137  10K  [0603-RES]  212.09,48.01 270 top
R138  10K  [0603-RES]  217.17,48.01 270 top
R139  10K  [0603-RES]  236.73,70.87 270 top
R140  10K  [0603-RES]  240.54,70.87 270 top
R141  10K  [0603-RES]  245.62,70.87 270 top
R142  10K  [0603-RES]  235.46,70.87 270 top
R143  10K  [0603-RES]  238,48.01 270 top
R144  10K  [0603-RES]  243.08,48.01 270 top
R145  10K  [0603-RES]  262.64,70.87 270 top
R146  10K  [0603-RES]  266.45,70.87 270 top
R147  10K  [0603-RES]  271.53,70.87 270 top
R148  10K  [0603-RES]  261.37,70.87 270 top
R149  10K  [0603-RES]  263.91,48.01 270 top
R150  10K  [0603-RES]  268.99,48.01 270 top
R151  10K  [0603-RES]  159,106.93 270 top
R152  10K  [0603-RES]  162.81,106.93 270 top
R153  10K  [0603-RES]  167.89,106.93 270 top
R154  10K  [0603-RES]  157.73,106.93 270 top
R155  10K  [0603-RES]  160.27,84.07 270 top
R156  10K  [0603-RES]  165.35,84.07 270 top
R157  10K  [0603-RES]  184.91,106.93 270 top
R158  10K  [0603-RES]  188.72,106.93 270 top
R159  10K  [0603-RES]  193.8,106.93 270 top
R160  10K  [0603-RES]  183.64,106.93 270 top
R161  10K  [0603-RES]  186.18,84.07 270 top
R162  10K  [0603-RES]  191.26,84.07 270 top
R163  10K  [0603-RES]  210.82,106.93 270 top
R164  10K  [0603-RES]  214.63,106.93 270 top
R165  10K  [0603-RES]  219.71,106.93 270 top
R166  10K  [0603-RES]  209.55,106.93 270 top
R167  10K  [0603-RES]  212.09,84.07 270 top
R168  10K  [0603-RES]  217.17,84.07 270 top
R169  10K  [0603-RES]  236.73,106.93 270 top
R170  10K  [0603-RES]  240.54,106.93 270 top
R171  10K  [0603-RES]  245.62,106.93 270 top
R172  10K  [0603-RES]  235.46,106.93 270 top
R173  10K  [0603-RES]  238,84.07 270 top
R174  10K  [0603-RES]  243.08,84.07 270 top
R175  10K  [0603-RES]  262.64,106.93 270 top
R176  10K  [0603-RES]  266.45,106.93 270 top
R177  10K  [0603-RES]  271.53,106.93 270 top
R178  10K  [0603-RES]  261.37,106.93 270 top
R179  10K  [0603-RES]  263.91,84.07 270 top
R180  10K  [0603-RES]  268.99,84.07 270 top
SJ1  [PAD-JUMPER-3-3OF3_NC_BY_TRACE_YES_SILK_FULL_BOX]  22.1,34.8 0 top
SJ2  VCC1-3.3V  [PAD-JUMPER-2-NC_BY_TRACE_YES_SILK]  15.75,32.26 180 bottom
SJ3  VCC2-3.3V  [PAD-JUMPER-2-NC_BY_TRACE_YES_SILK]  23.37,32.26 0 bottom
SJ4  [PAD-JUMPER-3-2OF3_NC_BY_TRACE_YES_SILK_FULL_BOX]  17.02,15.75 180 bottom
SJ5  [PAD-JUMPER-3-2OF3_NC_BY_TRACE_YES_SILK_FULL_BOX]  22.1,15.75 0 bottom
SJ6  A-VCC1  [PAD-JUMPER-2-NO_NO_SILK]  10.67,23.37 180 bottom
SJ7  GND  [PAD-JUMPER-2-NC_BY_TRACE_NO_SILK]  10.67,36.07 0 bottom
SJ8  B-VCC2  [PAD-JUMPER-2-NO_NO_SILK]  28.45,23.37 0 bottom
SJ9  GND  [PAD-JUMPER-2-NC_BY_TRACE_NO_SILK]  28.45,36.07 180 bottom
SJ10  VCC1-3.3V  [PAD-JUMPER-2-NC_BY_TRACE_YES_SILK]  41.66,32.26 180 bottom
SJ11  VCC2-3.3V  [PAD-JUMPER-2-NC_BY_TRACE_YES_SILK]  49.28,32.26 0 bottom
SJ12  [PAD-JUMPER-3-2OF3_NC_BY_TRACE_YES_SILK_FULL_BOX]  48.01,15.75 0 bottom
SJ13  [PAD-JUMPER-3-2OF3_NC_BY_TRACE_YES_SILK_FULL_BOX]  42.93,15.75 180 bottom
SJ14  [PAD-JUMPER-3-3OF3_NC_BY_TRACE_YES_SILK_FULL_BOX]  48.01,34.8 0 top
SJ15  A-VCC1  [PAD-JUMPER-2-NO_NO_SILK]  36.58,23.37 180 bottom
SJ16  B-VCC2  [PAD-JUMPER-2-NO_NO_SILK]  54.36,23.37 0 bottom
SJ17  GND  [PAD-JUMPER-2-NC_BY_TRACE_NO_SILK]  54.36,36.07 180 bottom
SJ18  GND  [PAD-JUMPER-2-NC_BY_TRACE_NO_SILK]  36.58,36.07 0 bottom
SJ19  VCC1-3.3V  [PAD-JUMPER-2-NC_BY_TRACE_YES_SILK]  67.56,32.26 180 bottom
SJ20  VCC2-3.3V  [PAD-JUMPER-2-NC_BY_TRACE_YES_SILK]  75.18,32.26 0 bottom
SJ21  [PAD-JUMPER-3-2OF3_NC_BY_TRACE_YES_SILK_FULL_BOX]  73.91,15.75 0 bottom
SJ22  [PAD-JUMPER-3-2OF3_NC_BY_TRACE_YES_SILK_FULL_BOX]  68.83,15.75 180 bottom
SJ23  [PAD-JUMPER-3-3OF3_NC_BY_TRACE_YES_SILK_FULL_BOX]  73.91,34.8 0 top
SJ24  A-VCC1  [PAD-JUMPER-2-NO_NO_SILK]  62.48,23.37 180 bottom
SJ25  B-VCC2  [PAD-JUMPER-2-NO_NO_SILK]  80.26,23.37 0 bottom
SJ26  GND  [PAD-JUMPER-2-NC_BY_TRACE_NO_SILK]  80.26,36.07 180 bottom
SJ27  GND  [PAD-JUMPER-2-NC_BY_TRACE_NO_SILK]  62.48,36.07 0 bottom
SJ28  VCC1-3.3V  [PAD-JUMPER-2-NC_BY_TRACE_YES_SILK]  93.47,32.26 180 bottom
SJ29  VCC2-3.3V  [PAD-JUMPER-2-NC_BY_TRACE_YES_SILK]  101.09,32.26 0 bottom
SJ30  [PAD-JUMPER-3-2OF3_NC_BY_TRACE_YES_SILK_FULL_BOX]  99.82,15.75 0 bottom
SJ31  [PAD-JUMPER-3-2OF3_NC_BY_TRACE_YES_SILK_FULL_BOX]  94.74,15.75 180 bottom
SJ32  [PAD-JUMPER-3-3OF3_NC_BY_TRACE_YES_SILK_FULL_BOX]  99.82,34.8 0 top
SJ33  A-VCC1  [PAD-JUMPER-2-NO_NO_SILK]  88.39,23.37 180 bottom
SJ34  B-VCC2  [PAD-JUMPER-2-NO_NO_SILK]  106.17,23.37 0 bottom
SJ35  GND  [PAD-JUMPER-2-NC_BY_TRACE_NO_SILK]  106.17,36.07 180 bottom
SJ36  GND  [PAD-JUMPER-2-NC_BY_TRACE_NO_SILK]  88.39,36.07 0 bottom
SJ37  VCC1-3.3V  [PAD-JUMPER-2-NC_BY_TRACE_YES_SILK]  119.38,32.26 180 bottom
SJ38  VCC2-3.3V  [PAD-JUMPER-2-NC_BY_TRACE_YES_SILK]  127,32.26 0 bottom
SJ39  [PAD-JUMPER-3-2OF3_NC_BY_TRACE_YES_SILK_FULL_BOX]  125.73,15.75 0 bottom
SJ40  [PAD-JUMPER-3-2OF3_NC_BY_TRACE_YES_SILK_FULL_BOX]  120.65,15.75 180 bottom
SJ41  [PAD-JUMPER-3-3OF3_NC_BY_TRACE_YES_SILK_FULL_BOX]  125.73,34.8 0 top
SJ42  A-VCC1  [PAD-JUMPER-2-NO_NO_SILK]  114.3,23.37 180 bottom
SJ43  B-VCC2  [PAD-JUMPER-2-NO_NO_SILK]  132.08,23.37 0 bottom
SJ44  GND  [PAD-JUMPER-2-NC_BY_TRACE_NO_SILK]  132.08,36.07 180 bottom
SJ45  GND  [PAD-JUMPER-2-NC_BY_TRACE_NO_SILK]  114.3,36.07 0 bottom
SJ46  VCC1-3.3V  [PAD-JUMPER-2-NC_BY_TRACE_YES_SILK]  15.75,68.33 180 bottom
SJ47  VCC2-3.3V  [PAD-JUMPER-2-NC_BY_TRACE_YES_SILK]  23.37,68.33 0 bottom
SJ48  [PAD-JUMPER-3-2OF3_NC_BY_TRACE_YES_SILK_FULL_BOX]  22.1,51.82 0 bottom
SJ49  [PAD-JUMPER-3-2OF3_NC_BY_TRACE_YES_SILK_FULL_BOX]  17.02,51.82 180 bottom
SJ50  [PAD-JUMPER-3-3OF3_NC_BY_TRACE_YES_SILK_FULL_BOX]  22.1,70.87 0 top
SJ51  A-VCC1  [PAD-JUMPER-2-NO_NO_SILK]  10.67,59.44 180 bottom
SJ52  B-VCC2  [PAD-JUMPER-2-NO_NO_SILK]  28.45,59.44 0 bottom
SJ53  GND  [PAD-JUMPER-2-NC_BY_TRACE_NO_SILK]  28.45,72.14 180 bottom
SJ54  GND  [PAD-JUMPER-2-NC_BY_TRACE_NO_SILK]  10.67,72.14 0 bottom
SJ55  VCC1-3.3V  [PAD-JUMPER-2-NC_BY_TRACE_YES_SILK]  41.66,68.33 180 bottom
SJ56  VCC2-3.3V  [PAD-JUMPER-2-NC_BY_TRACE_YES_SILK]  49.28,68.33 0 bottom
SJ57  [PAD-JUMPER-3-2OF3_NC_BY_TRACE_YES_SILK_FULL_BOX]  48.01,51.82 0 bottom
SJ58  [PAD-JUMPER-3-2OF3_NC_BY_TRACE_YES_SILK_FULL_BOX]  42.93,51.82 180 bottom
SJ59  [PAD-JUMPER-3-3OF3_NC_BY_TRACE_YES_SILK_FULL_BOX]  48.01,70.87 0 top
SJ60  A-VCC1  [PAD-JUMPER-2-NO_NO_SILK]  36.58,59.44 180 bottom
SJ61  B-VCC2  [PAD-JUMPER-2-NO_NO_SILK]  54.36,59.44 0 bottom
SJ62  GND  [PAD-JUMPER-2-NC_BY_TRACE_NO_SILK]  54.36,72.14 180 bottom
SJ63  GND  [PAD-JUMPER-2-NC_BY_TRACE_NO_SILK]  36.58,72.14 0 bottom
SJ64  VCC1-3.3V  [PAD-JUMPER-2-NC_BY_TRACE_YES_SILK]  67.56,68.33 180 bottom
SJ65  VCC2-3.3V  [PAD-JUMPER-2-NC_BY_TRACE_YES_SILK]  75.18,68.33 0 bottom
SJ66  [PAD-JUMPER-3-2OF3_NC_BY_TRACE_YES_SILK_FULL_BOX]  73.91,51.82 0 bottom
SJ67  [PAD-JUMPER-3-2OF3_NC_BY_TRACE_YES_SILK_FULL_BOX]  68.83,51.82 180 bottom
SJ68  [PAD-JUMPER-3-3OF3_NC_BY_TRACE_YES_SILK_FULL_BOX]  73.91,70.87 0 top
SJ69  A-VCC1  [PAD-JUMPER-2-NO_NO_SILK]  62.48,59.44 180 bottom
SJ70  B-VCC2  [PAD-JUMPER-2-NO_NO_SILK]  80.26,59.44 0 bottom
SJ71  GND  [PAD-JUMPER-2-NC_BY_TRACE_NO_SILK]  80.26,72.14 180 bottom
SJ72  GND  [PAD-JUMPER-2-NC_BY_TRACE_NO_SILK]  62.48,72.14 0 bottom
SJ73  VCC1-3.3V  [PAD-JUMPER-2-NC_BY_TRACE_YES_SILK]  93.47,68.33 180 bottom
SJ74  VCC2-3.3V  [PAD-JUMPER-2-NC_BY_TRACE_YES_SILK]  101.09,68.33 0 bottom
SJ75  [PAD-JUMPER-3-2OF3_NC_BY_TRACE_YES_SILK_FULL_BOX]  99.82,51.82 0 bottom
SJ76  [PAD-JUMPER-3-2OF3_NC_BY_TRACE_YES_SILK_FULL_BOX]  94.74,51.82 180 bottom
SJ77  [PAD-JUMPER-3-3OF3_NC_BY_TRACE_YES_SILK_FULL_BOX]  99.82,70.87 0 top
SJ78  A-VCC1  [PAD-JUMPER-2-NO_NO_SILK]  88.39,59.44 180 bottom
SJ79  B-VCC2  [PAD-JUMPER-2-NO_NO_SILK]  106.17,59.44 0 bottom
SJ80  GND  [PAD-JUMPER-2-NC_BY_TRACE_NO_SILK]  106.17,72.14 180 bottom
SJ81  GND  [PAD-JUMPER-2-NC_BY_TRACE_NO_SILK]  88.39,72.14 0 bottom
SJ82  VCC1-3.3V  [PAD-JUMPER-2-NC_BY_TRACE_YES_SILK]  119.38,68.33 180 bottom
SJ83  VCC2-3.3V  [PAD-JUMPER-2-NC_BY_TRACE_YES_SILK]  127,68.33 0 bottom
SJ84  [PAD-JUMPER-3-2OF3_NC_BY_TRACE_YES_SILK_FULL_BOX]  125.73,51.82 0 bottom
SJ85  [PAD-JUMPER-3-2OF3_NC_BY_TRACE_YES_SILK_FULL_BOX]  120.65,51.82 180 bottom
SJ86  [PAD-JUMPER-3-3OF3_NC_BY_TRACE_YES_SILK_FULL_BOX]  125.73,70.87 0 top
SJ87  A-VCC1  [PAD-JUMPER-2-NO_NO_SILK]  114.3,59.44 180 bottom
SJ88  B-VCC2  [PAD-JUMPER-2-NO_NO_SILK]  132.08,59.44 0 bottom
SJ89  GND  [PAD-JUMPER-2-NC_BY_TRACE_NO_SILK]  132.08,72.14 180 bottom
SJ90  GND  [PAD-JUMPER-2-NC_BY_TRACE_NO_SILK]  114.3,72.14 0 bottom
SJ91  VCC1-3.3V  [PAD-JUMPER-2-NC_BY_TRACE_YES_SILK]  15.75,104.39 180 bottom
SJ92  VCC2-3.3V  [PAD-JUMPER-2-NC_BY_TRACE_YES_SILK]  23.37,104.39 0 bottom
SJ93  [PAD-JUMPER-3-2OF3_NC_BY_TRACE_YES_SILK_FULL_BOX]  22.1,87.88 0 bottom
SJ94  [PAD-JUMPER-3-2OF3_NC_BY_TRACE_YES_SILK_FULL_BOX]  17.02,87.88 180 bottom
SJ95  [PAD-JUMPER-3-3OF3_NC_BY_TRACE_YES_SILK_FULL_BOX]  22.1,106.93 0 top
SJ96  A-VCC1  [PAD-JUMPER-2-NO_NO_SILK]  10.67,95.5 180 bottom
SJ97  B-VCC2  [PAD-JUMPER-2-NO_NO_SILK]  28.45,95.5 0 bottom
SJ98  GND  [PAD-JUMPER-2-NC_BY_TRACE_NO_SILK]  28.45,108.2 180 bottom
SJ99  GND  [PAD-JUMPER-2-NC_BY_TRACE_NO_SILK]  10.67,108.2 0 bottom
SJ100  VCC1-3.3V  [PAD-JUMPER-2-NC_BY_TRACE_YES_SILK]  41.66,104.39 180 bottom
SJ101  VCC2-3.3V  [PAD-JUMPER-2-NC_BY_TRACE_YES_SILK]  49.28,104.39 0 bottom
SJ102  [PAD-JUMPER-3-2OF3_NC_BY_TRACE_YES_SILK_FULL_BOX]  48.01,87.88 0 bottom
SJ103  [PAD-JUMPER-3-2OF3_NC_BY_TRACE_YES_SILK_FULL_BOX]  42.93,87.88 180 bottom
SJ104  [PAD-JUMPER-3-3OF3_NC_BY_TRACE_YES_SILK_FULL_BOX]  48.01,106.93 0 top
SJ105  A-VCC1  [PAD-JUMPER-2-NO_NO_SILK]  36.58,95.5 180 bottom
SJ106  B-VCC2  [PAD-JUMPER-2-NO_NO_SILK]  54.36,95.5 0 bottom
SJ107  GND  [PAD-JUMPER-2-NC_BY_TRACE_NO_SILK]  54.36,108.2 180 bottom
SJ108  GND  [PAD-JUMPER-2-NC_BY_TRACE_NO_SILK]  36.58,108.2 0 bottom
SJ109  VCC1-3.3V  [PAD-JUMPER-2-NC_BY_TRACE_YES_SILK]  67.56,104.39 180 bottom
SJ110  VCC2-3.3V  [PAD-JUMPER-2-NC_BY_TRACE_YES_SILK]  75.18,104.39 0 bottom
SJ111  [PAD-JUMPER-3-2OF3_NC_BY_TRACE_YES_SILK_FULL_BOX]  73.91,87.88 0 bottom
SJ112  [PAD-JUMPER-3-2OF3_NC_BY_TRACE_YES_SILK_FULL_BOX]  68.83,87.88 180 bottom
SJ113  [PAD-JUMPER-3-3OF3_NC_BY_TRACE_YES_SILK_FULL_BOX]  73.91,106.93 0 top
SJ114  A-VCC1  [PAD-JUMPER-2-NO_NO_SILK]  62.48,95.5 180 bottom
SJ115  B-VCC2  [PAD-JUMPER-2-NO_NO_SILK]  80.26,95.5 0 bottom
SJ116  GND  [PAD-JUMPER-2-NC_BY_TRACE_NO_SILK]  80.26,108.2 180 bottom
SJ117  GND  [PAD-JUMPER-2-NC_BY_TRACE_NO_SILK]  62.48,108.2 0 bottom
SJ118  VCC1-3.3V  [PAD-JUMPER-2-NC_BY_TRACE_YES_SILK]  93.47,104.39 180 bottom
SJ119  VCC2-3.3V  [PAD-JUMPER-2-NC_BY_TRACE_YES_SILK]  101.09,104.39 0 bottom
SJ120  [PAD-JUMPER-3-2OF3_NC_BY_TRACE_YES_SILK_FULL_BOX]  99.82,87.88 0 bottom
SJ121  [PAD-JUMPER-3-2OF3_NC_BY_TRACE_YES_SILK_FULL_BOX]  94.74,87.88 180 bottom
SJ122  [PAD-JUMPER-3-3OF3_NC_BY_TRACE_YES_SILK_FULL_BOX]  99.82,106.93 0 top
SJ123  A-VCC1  [PAD-JUMPER-2-NO_NO_SILK]  88.39,95.5 180 bottom
SJ124  B-VCC2  [PAD-JUMPER-2-NO_NO_SILK]  106.17,95.5 0 bottom
SJ125  GND  [PAD-JUMPER-2-NC_BY_TRACE_NO_SILK]  106.17,108.2 180 bottom
SJ126  GND  [PAD-JUMPER-2-NC_BY_TRACE_NO_SILK]  88.39,108.2 0 bottom
SJ127  VCC1-3.3V  [PAD-JUMPER-2-NC_BY_TRACE_YES_SILK]  119.38,104.39 180 bottom
SJ128  VCC2-3.3V  [PAD-JUMPER-2-NC_BY_TRACE_YES_SILK]  127,104.39 0 bottom
SJ129  [PAD-JUMPER-3-2OF3_NC_BY_TRACE_YES_SILK_FULL_BOX]  125.73,87.88 0 bottom
SJ130  [PAD-JUMPER-3-2OF3_NC_BY_TRACE_YES_SILK_FULL_BOX]  120.65,87.88 180 bottom
SJ131  [PAD-JUMPER-3-3OF3_NC_BY_TRACE_YES_SILK_FULL_BOX]  125.73,106.93 0 top
SJ132  A-VCC1  [PAD-JUMPER-2-NO_NO_SILK]  114.3,95.5 180 bottom
SJ133  B-VCC2  [PAD-JUMPER-2-NO_NO_SILK]  132.08,95.5 0 bottom
SJ134  GND  [PAD-JUMPER-2-NC_BY_TRACE_NO_SILK]  132.08,108.2 180 bottom
SJ135  GND  [PAD-JUMPER-2-NC_BY_TRACE_NO_SILK]  114.3,108.2 0 bottom
SJ136  VCC1-3.3V  [PAD-JUMPER-2-NC_BY_TRACE_YES_SILK]  159,32.26 180 bottom
SJ137  VCC2-3.3V  [PAD-JUMPER-2-NC_BY_TRACE_YES_SILK]  166.62,32.26 0 bottom
SJ138  [PAD-JUMPER-3-2OF3_NC_BY_TRACE_YES_SILK_FULL_BOX]  165.35,15.75 0 bottom
SJ139  [PAD-JUMPER-3-2OF3_NC_BY_TRACE_YES_SILK_FULL_BOX]  160.27,15.75 180 bottom
SJ140  [PAD-JUMPER-3-3OF3_NC_BY_TRACE_YES_SILK_FULL_BOX]  165.35,34.8 0 top
SJ141  A-VCC1  [PAD-JUMPER-2-NO_NO_SILK]  153.92,23.37 180 bottom
SJ142  B-VCC2  [PAD-JUMPER-2-NO_NO_SILK]  171.7,23.37 0 bottom
SJ143  GND  [PAD-JUMPER-2-NC_BY_TRACE_NO_SILK]  171.7,36.07 180 bottom
SJ144  GND  [PAD-JUMPER-2-NC_BY_TRACE_NO_SILK]  153.92,36.07 0 bottom
SJ145  VCC1-3.3V  [PAD-JUMPER-2-NC_BY_TRACE_YES_SILK]  184.91,32.26 180 bottom
SJ146  VCC2-3.3V  [PAD-JUMPER-2-NC_BY_TRACE_YES_SILK]  192.53,32.26 0 bottom
SJ147  [PAD-JUMPER-3-2OF3_NC_BY_TRACE_YES_SILK_FULL_BOX]  191.26,15.75 0 bottom
SJ148  [PAD-JUMPER-3-2OF3_NC_BY_TRACE_YES_SILK_FULL_BOX]  186.18,15.75 180 bottom
SJ149  [PAD-JUMPER-3-3OF3_NC_BY_TRACE_YES_SILK_FULL_BOX]  191.26,34.8 0 top
SJ150  A-VCC1  [PAD-JUMPER-2-NO_NO_SILK]  179.83,23.37 180 bottom
SJ151  B-VCC2  [PAD-JUMPER-2-NO_NO_SILK]  197.61,23.37 0 bottom
SJ152  GND  [PAD-JUMPER-2-NC_BY_TRACE_NO_SILK]  197.61,36.07 180 bottom
SJ153  GND  [PAD-JUMPER-2-NC_BY_TRACE_NO_SILK]  179.83,36.07 0 bottom
SJ154  VCC1-3.3V  [PAD-JUMPER-2-NC_BY_TRACE_YES_SILK]  210.82,32.26 180 bottom
SJ155  VCC2-3.3V  [PAD-JUMPER-2-NC_BY_TRACE_YES_SILK]  218.44,32.26 0 bottom
SJ156  [PAD-JUMPER-3-2OF3_NC_BY_TRACE_YES_SILK_FULL_BOX]  217.17,15.75 0 bottom
SJ157  [PAD-JUMPER-3-2OF3_NC_BY_TRACE_YES_SILK_FULL_BOX]  212.09,15.75 180 bottom
SJ158  [PAD-JUMPER-3-3OF3_NC_BY_TRACE_YES_SILK_FULL_BOX]  217.17,34.8 0 top
SJ159  A-VCC1  [PAD-JUMPER-2-NO_NO_SILK]  205.74,23.37 180 bottom
SJ160  B-VCC2  [PAD-JUMPER-2-NO_NO_SILK]  223.52,23.37 0 bottom
SJ161  GND  [PAD-JUMPER-2-NC_BY_TRACE_NO_SILK]  223.52,36.07 180 bottom
SJ162  GND  [PAD-JUMPER-2-NC_BY_TRACE_NO_SILK]  205.74,36.07 0 bottom
SJ163  VCC1-3.3V  [PAD-JUMPER-2-NC_BY_TRACE_YES_SILK]  236.73,32.26 180 bottom
SJ164  VCC2-3.3V  [PAD-JUMPER-2-NC_BY_TRACE_YES_SILK]  244.35,32.26 0 bottom
SJ165  [PAD-JUMPER-3-2OF3_NC_BY_TRACE_YES_SILK_FULL_BOX]  243.08,15.75 0 bottom
SJ166  [PAD-JUMPER-3-2OF3_NC_BY_TRACE_YES_SILK_FULL_BOX]  238,15.75 180 bottom
SJ167  [PAD-JUMPER-3-3OF3_NC_BY_TRACE_YES_SILK_FULL_BOX]  243.08,34.8 0 top
SJ168  A-VCC1  [PAD-JUMPER-2-NO_NO_SILK]  231.65,23.37 180 bottom
SJ169  B-VCC2  [PAD-JUMPER-2-NO_NO_SILK]  249.43,23.37 0 bottom
SJ170  GND  [PAD-JUMPER-2-NC_BY_TRACE_NO_SILK]  249.43,36.07 180 bottom
SJ171  GND  [PAD-JUMPER-2-NC_BY_TRACE_NO_SILK]  231.65,36.07 0 bottom
SJ172  VCC1-3.3V  [PAD-JUMPER-2-NC_BY_TRACE_YES_SILK]  262.64,32.26 180 bottom
SJ173  VCC2-3.3V  [PAD-JUMPER-2-NC_BY_TRACE_YES_SILK]  270.26,32.26 0 bottom
SJ174  [PAD-JUMPER-3-2OF3_NC_BY_TRACE_YES_SILK_FULL_BOX]  268.99,15.75 0 bottom
SJ175  [PAD-JUMPER-3-2OF3_NC_BY_TRACE_YES_SILK_FULL_BOX]  263.91,15.75 180 bottom
SJ176  [PAD-JUMPER-3-3OF3_NC_BY_TRACE_YES_SILK_FULL_BOX]  268.99,34.8 0 top
SJ177  A-VCC1  [PAD-JUMPER-2-NO_NO_SILK]  257.56,23.37 180 bottom
SJ178  B-VCC2  [PAD-JUMPER-2-NO_NO_SILK]  275.34,23.37 0 bottom
SJ179  GND  [PAD-JUMPER-2-NC_BY_TRACE_NO_SILK]  275.34,36.07 180 bottom
SJ180  GND  [PAD-JUMPER-2-NC_BY_TRACE_NO_SILK]  257.56,36.07 0 bottom
SJ181  VCC1-3.3V  [PAD-JUMPER-2-NC_BY_TRACE_YES_SILK]  159,68.33 180 bottom
SJ182  VCC2-3.3V  [PAD-JUMPER-2-NC_BY_TRACE_YES_SILK]  166.62,68.33 0 bottom
SJ183  [PAD-JUMPER-3-2OF3_NC_BY_TRACE_YES_SILK_FULL_BOX]  165.35,51.82 0 bottom
SJ184  [PAD-JUMPER-3-2OF3_NC_BY_TRACE_YES_SILK_FULL_BOX]  160.27,51.82 180 bottom
SJ185  [PAD-JUMPER-3-3OF3_NC_BY_TRACE_YES_SILK_FULL_BOX]  165.35,70.87 0 top
SJ186  A-VCC1  [PAD-JUMPER-2-NO_NO_SILK]  153.92,59.44 180 bottom
SJ187  B-VCC2  [PAD-JUMPER-2-NO_NO_SILK]  171.7,59.44 0 bottom
SJ188  GND  [PAD-JUMPER-2-NC_BY_TRACE_NO_SILK]  171.7,72.14 180 bottom
SJ189  GND  [PAD-JUMPER-2-NC_BY_TRACE_NO_SILK]  153.92,72.14 0 bottom
SJ190  VCC1-3.3V  [PAD-JUMPER-2-NC_BY_TRACE_YES_SILK]  184.91,68.33 180 bottom
SJ191  VCC2-3.3V  [PAD-JUMPER-2-NC_BY_TRACE_YES_SILK]  192.53,68.33 0 bottom
SJ192  [PAD-JUMPER-3-2OF3_NC_BY_TRACE_YES_SILK_FULL_BOX]  191.26,51.82 0 bottom
SJ193  [PAD-JUMPER-3-2OF3_NC_BY_TRACE_YES_SILK_FULL_BOX]  186.18,51.82 180 bottom
SJ194  [PAD-JUMPER-3-3OF3_NC_BY_TRACE_YES_SILK_FULL_BOX]  191.26,70.87 0 top
SJ195  A-VCC1  [PAD-JUMPER-2-NO_NO_SILK]  179.83,59.44 180 bottom
SJ196  B-VCC2  [PAD-JUMPER-2-NO_NO_SILK]  197.61,59.44 0 bottom
SJ197  GND  [PAD-JUMPER-2-NC_BY_TRACE_NO_SILK]  197.61,72.14 180 bottom
SJ198  GND  [PAD-JUMPER-2-NC_BY_TRACE_NO_SILK]  179.83,72.14 0 bottom
SJ199  VCC1-3.3V  [PAD-JUMPER-2-NC_BY_TRACE_YES_SILK]  210.82,68.33 180 bottom
SJ200  VCC2-3.3V  [PAD-JUMPER-2-NC_BY_TRACE_YES_SILK]  218.44,68.33 0 bottom
SJ201  [PAD-JUMPER-3-2OF3_NC_BY_TRACE_YES_SILK_FULL_BOX]  217.17,51.82 0 bottom
SJ202  [PAD-JUMPER-3-2OF3_NC_BY_TRACE_YES_SILK_FULL_BOX]  212.09,51.82 180 bottom
SJ203  [PAD-JUMPER-3-3OF3_NC_BY_TRACE_YES_SILK_FULL_BOX]  217.17,70.87 0 top
SJ204  A-VCC1  [PAD-JUMPER-2-NO_NO_SILK]  205.74,59.44 180 bottom
SJ205  B-VCC2  [PAD-JUMPER-2-NO_NO_SILK]  223.52,59.44 0 bottom
SJ206  GND  [PAD-JUMPER-2-NC_BY_TRACE_NO_SILK]  223.52,72.14 180 bottom
SJ207  GND  [PAD-JUMPER-2-NC_BY_TRACE_NO_SILK]  205.74,72.14 0 bottom
SJ208  VCC1-3.3V  [PAD-JUMPER-2-NC_BY_TRACE_YES_SILK]  236.73,68.33 180 bottom
SJ209  VCC2-3.3V  [PAD-JUMPER-2-NC_BY_TRACE_YES_SILK]  244.35,68.33 0 bottom
SJ210  [PAD-JUMPER-3-2OF3_NC_BY_TRACE_YES_SILK_FULL_BOX]  243.08,51.82 0 bottom
SJ211  [PAD-JUMPER-3-2OF3_NC_BY_TRACE_YES_SILK_FULL_BOX]  238,51.82 180 bottom
SJ212  [PAD-JUMPER-3-3OF3_NC_BY_TRACE_YES_SILK_FULL_BOX]  243.08,70.87 0 top
SJ213  A-VCC1  [PAD-JUMPER-2-NO_NO_SILK]  231.65,59.44 180 bottom
SJ214  B-VCC2  [PAD-JUMPER-2-NO_NO_SILK]  249.43,59.44 0 bottom
SJ215  GND  [PAD-JUMPER-2-NC_BY_TRACE_NO_SILK]  249.43,72.14 180 bottom
SJ216  GND  [PAD-JUMPER-2-NC_BY_TRACE_NO_SILK]  231.65,72.14 0 bottom
SJ217  VCC1-3.3V  [PAD-JUMPER-2-NC_BY_TRACE_YES_SILK]  262.64,68.33 180 bottom
SJ218  VCC2-3.3V  [PAD-JUMPER-2-NC_BY_TRACE_YES_SILK]  270.26,68.33 0 bottom
SJ219  [PAD-JUMPER-3-2OF3_NC_BY_TRACE_YES_SILK_FULL_BOX]  268.99,51.82 0 bottom
SJ220  [PAD-JUMPER-3-2OF3_NC_BY_TRACE_YES_SILK_FULL_BOX]  263.91,51.82 180 bottom
SJ221  [PAD-JUMPER-3-3OF3_NC_BY_TRACE_YES_SILK_FULL_BOX]  268.99,70.87 0 top
SJ222  A-VCC1  [PAD-JUMPER-2-NO_NO_SILK]  257.56,59.44 180 bottom
SJ223  B-VCC2  [PAD-JUMPER-2-NO_NO_SILK]  275.34,59.44 0 bottom
SJ224  GND  [PAD-JUMPER-2-NC_BY_TRACE_NO_SILK]  275.34,72.14 180 bottom
SJ225  GND  [PAD-JUMPER-2-NC_BY_TRACE_NO_SILK]  257.56,72.14 0 bottom
SJ226  VCC1-3.3V  [PAD-JUMPER-2-NC_BY_TRACE_YES_SILK]  159,104.39 180 bottom
SJ227  VCC2-3.3V  [PAD-JUMPER-2-NC_BY_TRACE_YES_SILK]  166.62,104.39 0 bottom
SJ228  [PAD-JUMPER-3-2OF3_NC_BY_TRACE_YES_SILK_FULL_BOX]  165.35,87.88 0 bottom
SJ229  [PAD-JUMPER-3-2OF3_NC_BY_TRACE_YES_SILK_FULL_BOX]  160.27,87.88 180 bottom
SJ230  [PAD-JUMPER-3-3OF3_NC_BY_TRACE_YES_SILK_FULL_BOX]  165.35,106.93 0 top
SJ231  A-VCC1  [PAD-JUMPER-2-NO_NO_SILK]  153.92,95.5 180 bottom
SJ232  B-VCC2  [PAD-JUMPER-2-NO_NO_SILK]  171.7,95.5 0 bottom
SJ233  GND  [PAD-JUMPER-2-NC_BY_TRACE_NO_SILK]  171.7,108.2 180 bottom
SJ234  GND  [PAD-JUMPER-2-NC_BY_TRACE_NO_SILK]  153.92,108.2 0 bottom
SJ235  VCC1-3.3V  [PAD-JUMPER-2-NC_BY_TRACE_YES_SILK]  184.91,104.39 180 bottom
SJ236  VCC2-3.3V  [PAD-JUMPER-2-NC_BY_TRACE_YES_SILK]  192.53,104.39 0 bottom
SJ237  [PAD-JUMPER-3-2OF3_NC_BY_TRACE_YES_SILK_FULL_BOX]  191.26,87.88 0 bottom
SJ238  [PAD-JUMPER-3-2OF3_NC_BY_TRACE_YES_SILK_FULL_BOX]  186.18,87.88 180 bottom
SJ239  [PAD-JUMPER-3-3OF3_NC_BY_TRACE_YES_SILK_FULL_BOX]  191.26,106.93 0 top
SJ240  A-VCC1  [PAD-JUMPER-2-NO_NO_SILK]  179.83,95.5 180 bottom
SJ241  B-VCC2  [PAD-JUMPER-2-NO_NO_SILK]  197.61,95.5 0 bottom
SJ242  GND  [PAD-JUMPER-2-NC_BY_TRACE_NO_SILK]  197.61,108.2 180 bottom
SJ243  GND  [PAD-JUMPER-2-NC_BY_TRACE_NO_SILK]  179.83,108.2 0 bottom
SJ244  VCC1-3.3V  [PAD-JUMPER-2-NC_BY_TRACE_YES_SILK]  210.82,104.39 180 bottom
SJ245  VCC2-3.3V  [PAD-JUMPER-2-NC_BY_TRACE_YES_SILK]  218.44,104.39 0 bottom
SJ246  [PAD-JUMPER-3-2OF3_NC_BY_TRACE_YES_SILK_FULL_BOX]  217.17,87.88 0 bottom
SJ247  [PAD-JUMPER-3-2OF3_NC_BY_TRACE_YES_SILK_FULL_BOX]  212.09,87.88 180 bottom
SJ248  [PAD-JUMPER-3-3OF3_NC_BY_TRACE_YES_SILK_FULL_BOX]  217.17,106.93 0 top
SJ249  A-VCC1  [PAD-JUMPER-2-NO_NO_SILK]  205.74,95.5 180 bottom
SJ250  B-VCC2  [PAD-JUMPER-2-NO_NO_SILK]  223.52,95.5 0 bottom
SJ251  GND  [PAD-JUMPER-2-NC_BY_TRACE_NO_SILK]  223.52,108.2 180 bottom
SJ252  GND  [PAD-JUMPER-2-NC_BY_TRACE_NO_SILK]  205.74,108.2 0 bottom
SJ253  VCC1-3.3V  [PAD-JUMPER-2-NC_BY_TRACE_YES_SILK]  236.73,104.39 180 bottom
SJ254  VCC2-3.3V  [PAD-JUMPER-2-NC_BY_TRACE_YES_SILK]  244.35,104.39 0 bottom
SJ255  [PAD-JUMPER-3-2OF3_NC_BY_TRACE_YES_SILK_FULL_BOX]  243.08,87.88 0 bottom
SJ256  [PAD-JUMPER-3-2OF3_NC_BY_TRACE_YES_SILK_FULL_BOX]  238,87.88 180 bottom
SJ257  [PAD-JUMPER-3-3OF3_NC_BY_TRACE_YES_SILK_FULL_BOX]  243.08,106.93 0 top
SJ258  A-VCC1  [PAD-JUMPER-2-NO_NO_SILK]  231.65,95.5 180 bottom
SJ259  B-VCC2  [PAD-JUMPER-2-NO_NO_SILK]  249.43,95.5 0 bottom
SJ260  GND  [PAD-JUMPER-2-NC_BY_TRACE_NO_SILK]  249.43,108.2 180 bottom
SJ261  GND  [PAD-JUMPER-2-NC_BY_TRACE_NO_SILK]  231.65,108.2 0 bottom
SJ262  VCC1-3.3V  [PAD-JUMPER-2-NC_BY_TRACE_YES_SILK]  262.64,104.39 180 bottom
SJ263  VCC2-3.3V  [PAD-JUMPER-2-NC_BY_TRACE_YES_SILK]  270.26,104.39 0 bottom
SJ264  [PAD-JUMPER-3-2OF3_NC_BY_TRACE_YES_SILK_FULL_BOX]  268.99,87.88 0 bottom
SJ265  [PAD-JUMPER-3-2OF3_NC_BY_TRACE_YES_SILK_FULL_BOX]  263.91,87.88 180 bottom
SJ266  [PAD-JUMPER-3-3OF3_NC_BY_TRACE_YES_SILK_FULL_BOX]  268.99,106.93 0 top
SJ267  A-VCC1  [PAD-JUMPER-2-NO_NO_SILK]  257.56,95.5 180 bottom
SJ268  B-VCC2  [PAD-JUMPER-2-NO_NO_SILK]  275.34,95.5 0 bottom
SJ269  GND  [PAD-JUMPER-2-NC_BY_TRACE_NO_SILK]  275.34,108.2 180 bottom
SJ270  GND  [PAD-JUMPER-2-NC_BY_TRACE_NO_SILK]  257.56,108.2 0 bottom
STANDOFF1  STAND-OFF  [STAND-OFF]  9.27,9.27 0 top
STANDOFF2  STAND-OFF  [STAND-OFF]  9.27,40.01 0 top
STANDOFF3  STAND-OFF  [STAND-OFF]  29.84,9.27 0 top
STANDOFF4  STAND-OFF  [STAND-OFF]  29.84,40.01 0 top
STANDOFF5  STAND-OFF  [STAND-OFF]  55.75,9.27 0 top
STANDOFF6  STAND-OFF  [STAND-OFF]  35.18,9.27 0 top
STANDOFF7  STAND-OFF  [STAND-OFF]  35.18,40.01 0 top
STANDOFF8  STAND-OFF  [STAND-OFF]  55.75,40.01 0 top
STANDOFF9  STAND-OFF  [STAND-OFF]  81.66,9.27 0 top
STANDOFF10  STAND-OFF  [STAND-OFF]  61.09,9.27 0 top
STANDOFF11  STAND-OFF  [STAND-OFF]  61.09,40.01 0 top
STANDOFF12  STAND-OFF  [STAND-OFF]  81.66,40.01 0 top
STANDOFF13  STAND-OFF  [STAND-OFF]  107.57,9.27 0 top
STANDOFF14  STAND-OFF  [STAND-OFF]  87,9.27 0 top
STANDOFF15  STAND-OFF  [STAND-OFF]  87,40.01 0 top
STANDOFF16  STAND-OFF  [STAND-OFF]  107.57,40.01 0 top
STANDOFF17  STAND-OFF  [STAND-OFF]  133.48,9.27 0 top
STANDOFF18  STAND-OFF  [STAND-OFF]  112.9,9.27 0 top
STANDOFF19  STAND-OFF  [STAND-OFF]  112.9,40.01 0 top
STANDOFF20  STAND-OFF  [STAND-OFF]  133.48,40.01 0 top
STANDOFF21  STAND-OFF  [STAND-OFF]  29.84,45.34 0 top
STANDOFF22  STAND-OFF  [STAND-OFF]  9.27,45.34 0 top
STANDOFF23  STAND-OFF  [STAND-OFF]  9.27,76.07 0 top
STANDOFF24  STAND-OFF  [STAND-OFF]  29.84,76.07 0 top
STANDOFF25  STAND-OFF  [STAND-OFF]  55.75,45.34 0 top
STANDOFF26  STAND-OFF  [STAND-OFF]  35.18,45.34 0 top